# Allegro board newPowerSupply.brd
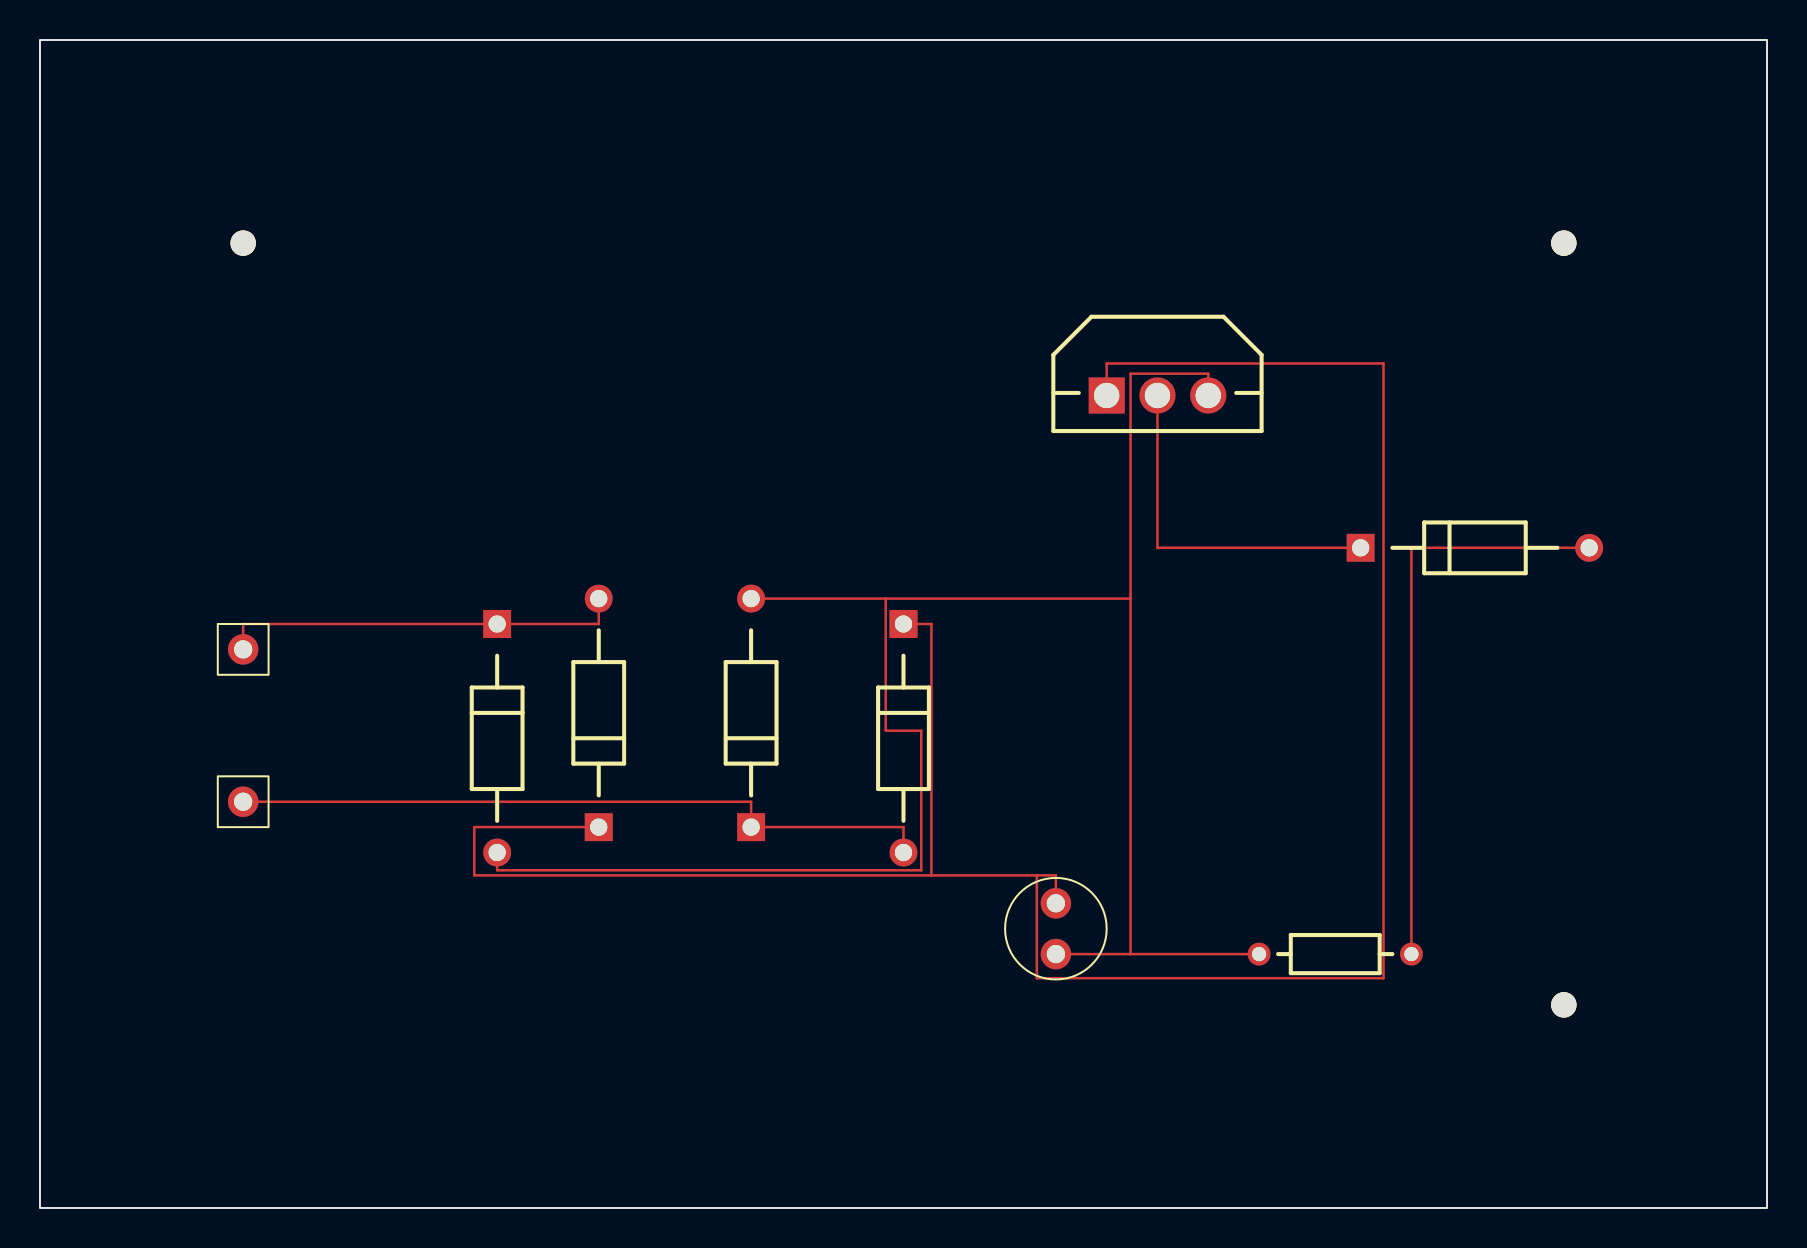
[diagram p0: board, top side]
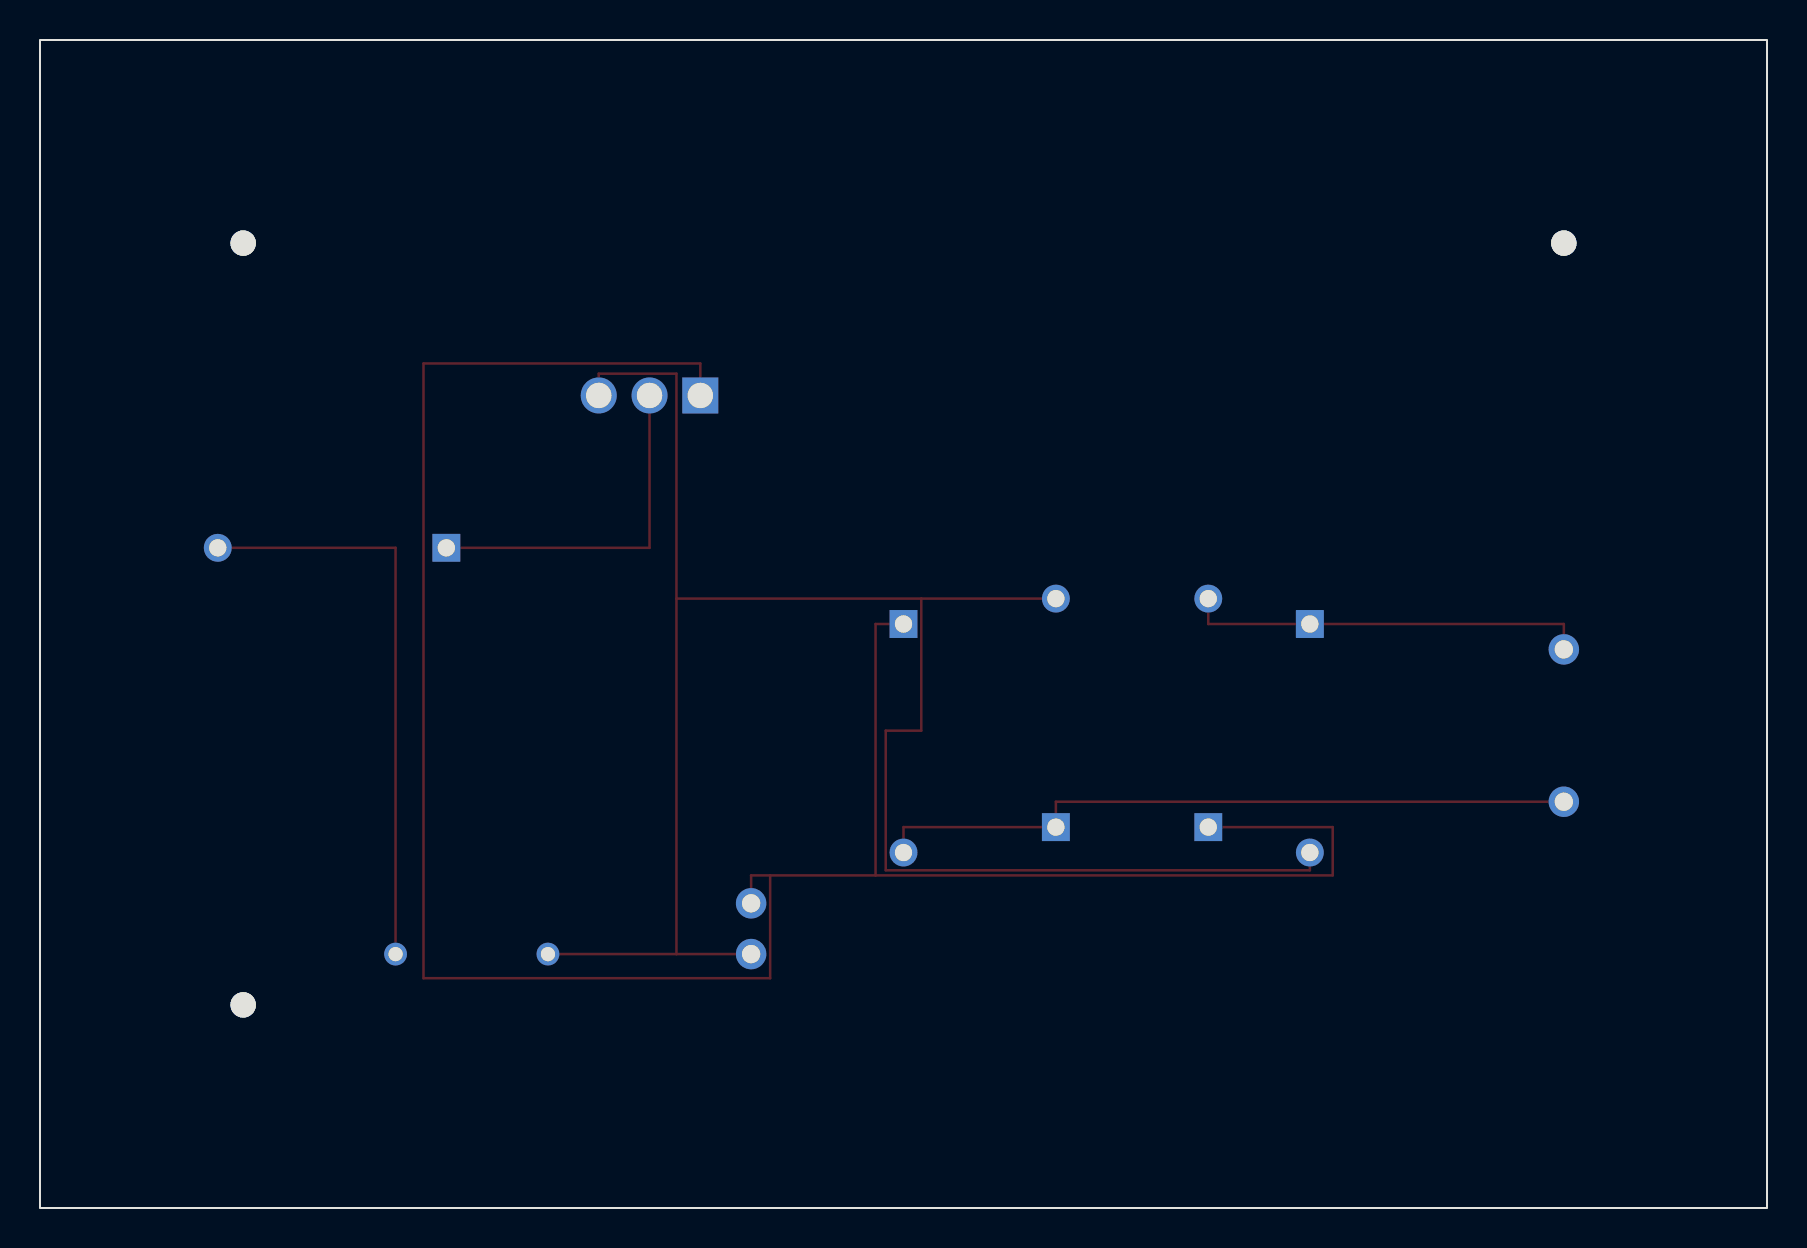
[diagram p1: board, bottom side, seen from below]

Outline 86.36 x 58.42 mm; copper layers: TOP, BOTTOM. Coordinates in mm from the lower left corner of the outline.
Outline path: rectangle 0,0 86.36,58.42

## Design rules (mm)
constraint set DEFAULT: min track width 0.127

## Placement (name value [footprint] x y rotation side)
C1  2200uf  [CAP196]  50.8 12.7 0 top
D1  D1N4148  [DAX2DO35]  22.86 17.78 270 top
D2  D1N4148  [DAX2DO35]  27.94 30.48 90 top
D3  D1N4148  [DAX2DO35]  35.56 30.48 90 top
D4  D1N4148  [DAX2DO35]  43.18 17.78 270 top
D5  MLED81  [DAX1DO35]  66.04 33.02 0 top
J1  CON1  [JUMPER1]  10.16 27.94 0 top
J2  CON1  [JUMPER1]  10.16 20.32 0 top
NOREF  -  [unnamed]  76.2 10.16 0 top
NOREF#2  -  [unnamed]  76.2 48.26 0 top
NOREF#3  -  [unnamed]  10.16 48.26 0 top
R1  1k  [AXRC05]  68.58 12.7 180 top
U1  LM7805C  [TO202AB]  53.34 40.64 0 top

## Library data of the parts
C1 = C: Tolerance: ***; User Part Number: ***
D1 = 1N4148
D2-D4 = D1N4148
D5 = MLED81
J1 J2 = CON1: User Part Number: ***
R1 = R
U1 = LM7805C

## Footprints (pads in the part's own frame, mm; a bottom-side part is the same pattern mirrored in y, then rotated)
AXRC05
  round 1.143 hole 0.711: 1(0,0) 2(7.62,0)
CAP196
  round 1.524 hole 0.914: 1(0,0) 2(0,2.54)
DAX1DO35
  rect 1.397x1.397 hole 0.864: 1(0,0)
  round 1.397 hole 0.864: 2(11.43,0)
DAX2DO35
  round 1.397 hole 0.864: 1(0,0)
  rect 1.397x1.397 hole 0.864: 2(-11.43,0)
JUMPER1
  round 1.524 hole 0.914: 1(0,0)
TO202AB
  rect 1.803x1.803 hole 1.27: 1(0,0)
  round 1.803 hole 1.27: 2(2.54,0) 3(5.08,0)
unnamed
  round 1.27 hole 3.962 unplated: (0,0)

## Nets
0: C1.1 D1.1 D3.1 R1.2 U1.3
N00825: D1.2 D2.1 J1.1
N00913: C1.2 D2.2 D4.2 U1.1
N01015: D3.2 D4.1 J2.1
N01875: D5.1 U1.2(OUT)
N01910: D5.2(C) R1.1

## Routing (per net, layer and track width the routed paths; a pad name or vN(x,y) marks a point on that pad's centre or on a via; arc(x,y) is an arc through that point)
0: length 100.6
  TOP w0.127: 54.53,30.48 42.29,30.48 ; 54.53,30.48 54.53,41.73 58.42,41.73 U1.3 ; 54.53,30.48 54.53,12.7 ; 42.29,30.48 42.29,23.88 44.07,23.88 44.07,16.89 22.86,16.89 D1.1 ; 42.29,30.48 D3.1 ; R1.2 54.53,12.7 ; 54.53,12.7 C1.1
N00825: length 20.3
  TOP w0.127: J1.1 10.16,29.21 D1.2 27.94,29.21 D2.1
N00913: length 121.8
  TOP w0.127: 44.58,16.64 44.58,29.21 D4.2 ; 44.58,16.64 21.72,16.64 21.72,19.05 D2.2 ; 44.58,16.64 49.85,16.64 ; 49.85,16.64 49.85,11.49 67.18,11.49 67.18,42.24 53.34,42.24 U1.1 ; 49.85,16.64 50.8,16.64 C1.2
N01015: length 35.6
  TOP w0.127: J2.1 35.56,20.32 D3.2 43.18,19.05 D4.1
N01875: length 17.8
  TOP w0.127: D5.1 55.88,33.02 U1.2
N01910: length 29.2
  TOP w0.127: D5.2 68.58,33.02 R1.1
